# Altium PCB PlacaAmplificador.PcbDoc
Units mm, origin at the board's own origin, x right, y up, seen from the top; angles counter-clockwise.
Board outline 50 x 50 mm, 2 copper layers (Top Layer, Bottom Layer); 17 components, 14 nets, 43 pads, 4 vias.
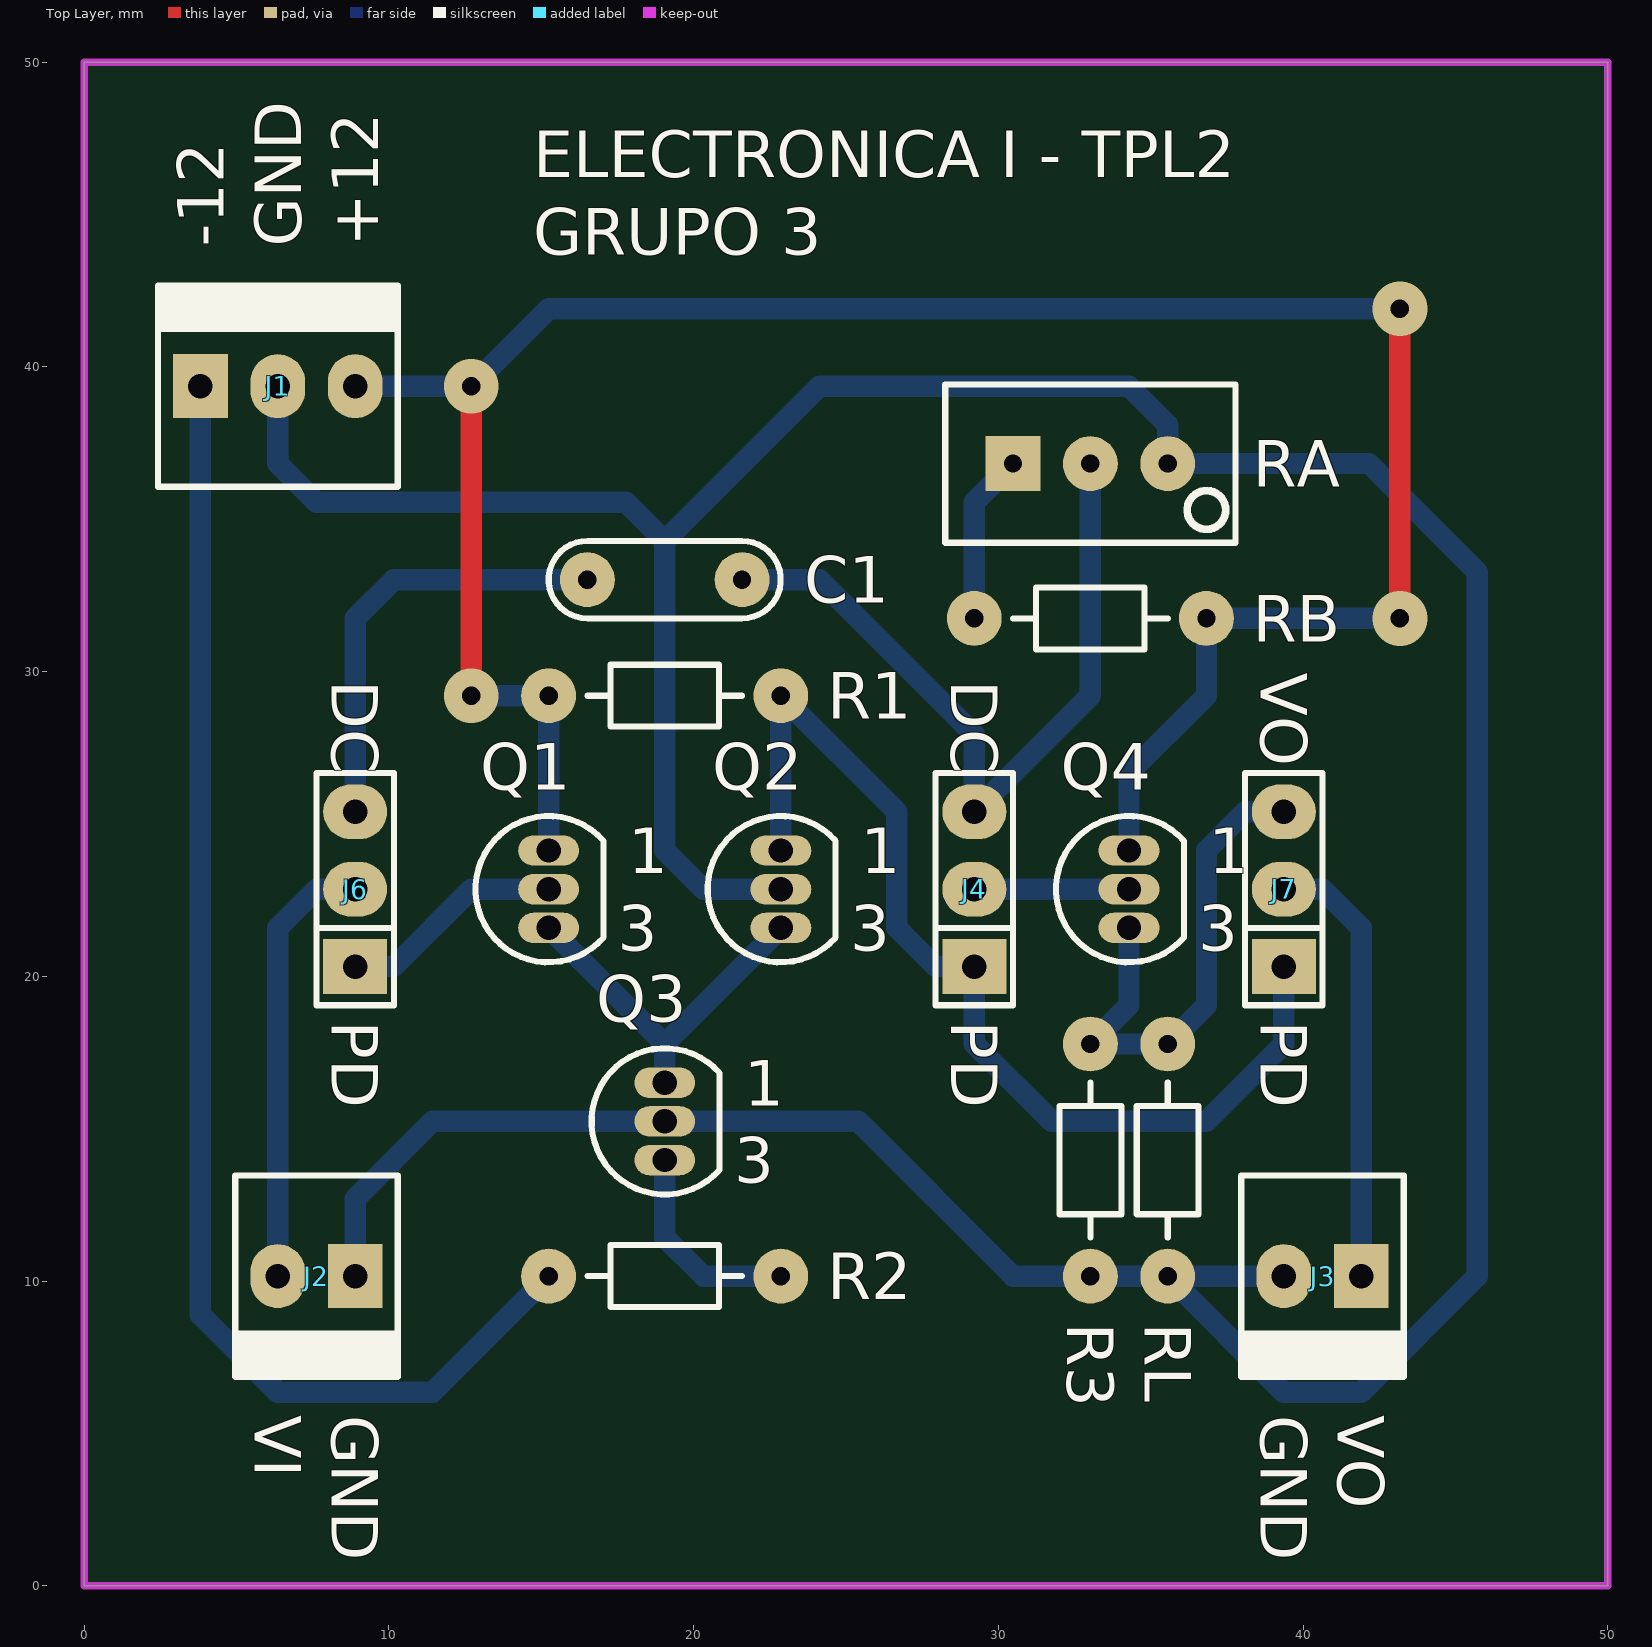
[diagram p0: Top Layer view]
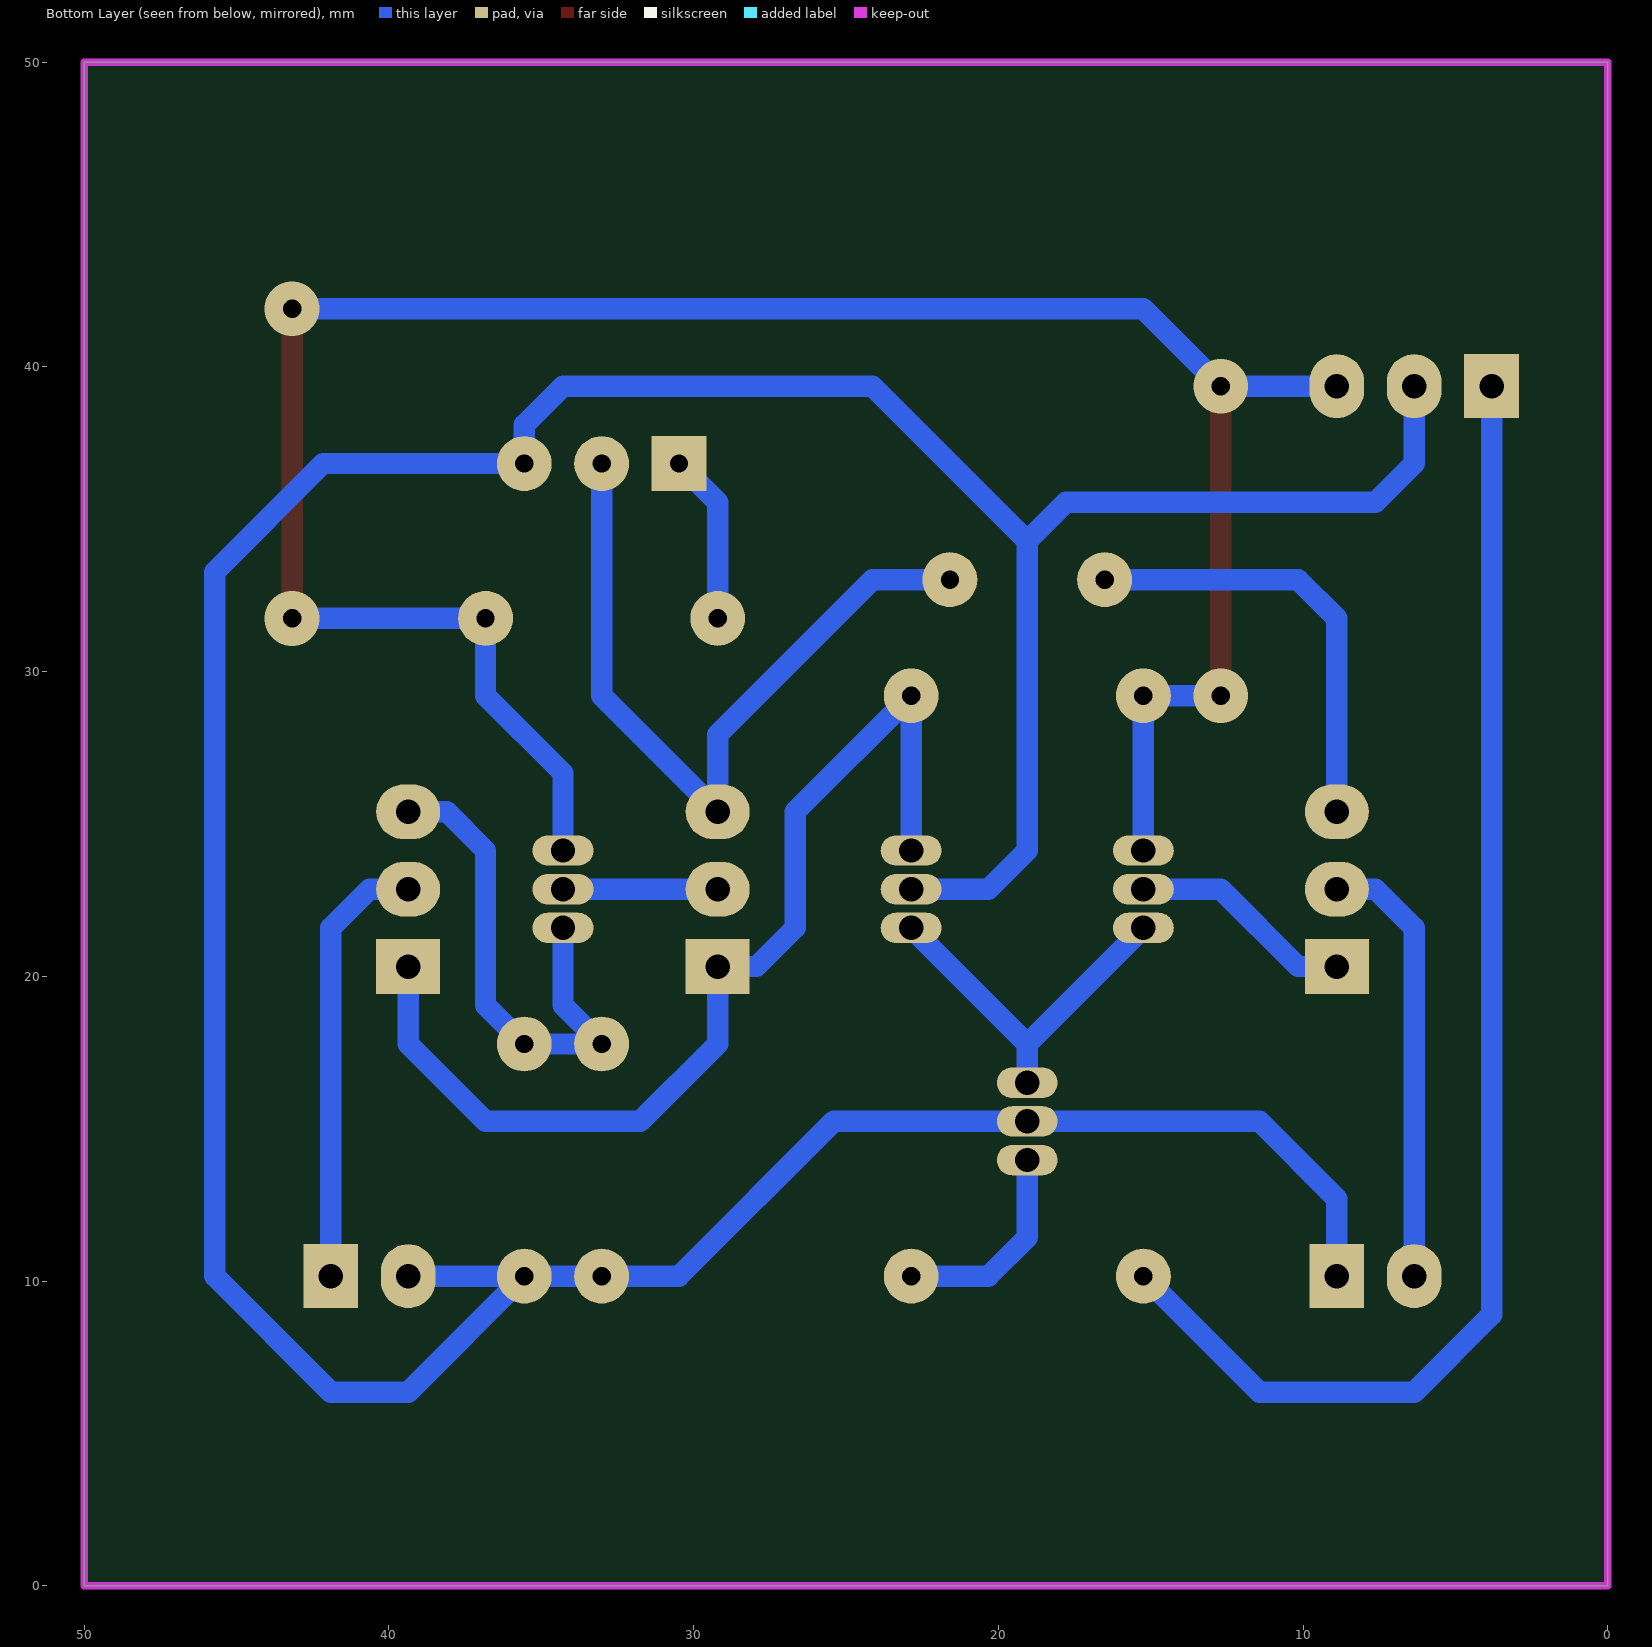
[diagram p1: Bottom Layer view, seen from below]
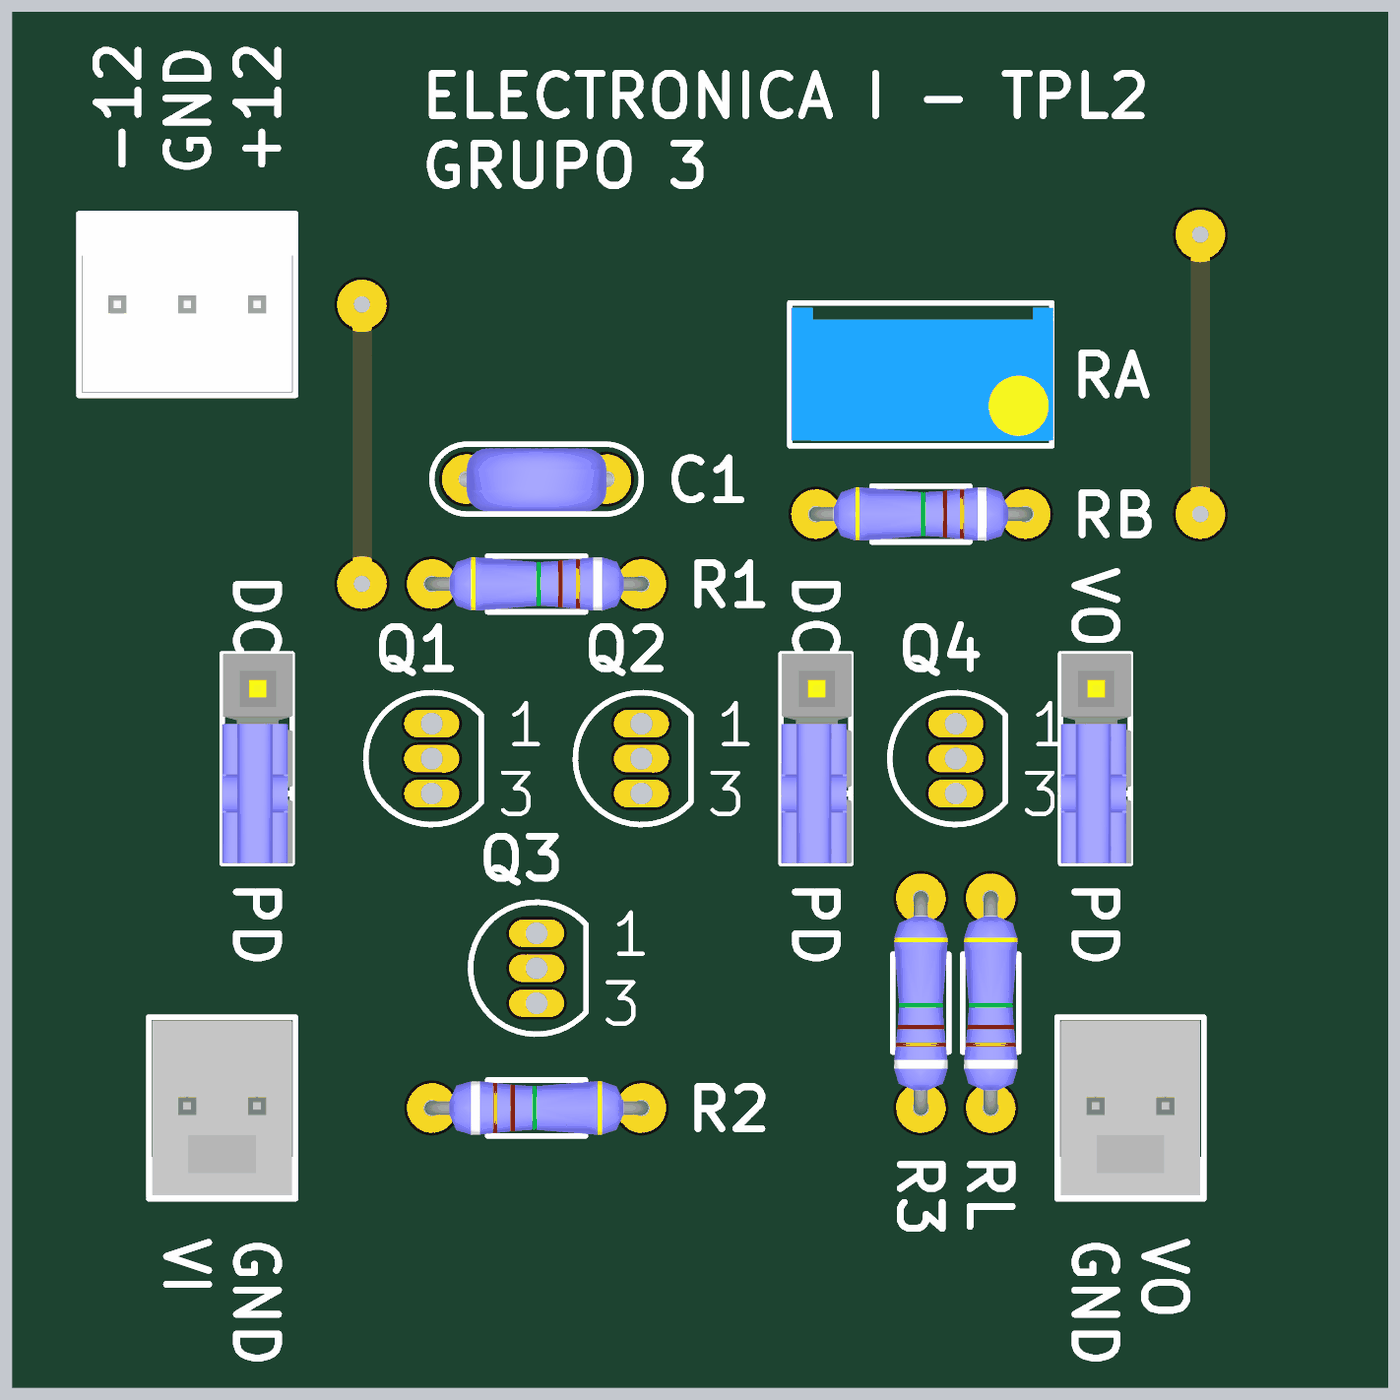
[diagram p2: 3D render of the assembled board from above, using the file's embedded part models]

## Layer stack, top to bottom
Top Solder: solder mask 0.0102, Solder Resist, Dk 3.5
Top Layer: signal copper 0.0356
Dielectric 1: dielectric 0.32, FR-4, Dk 4.8
Bottom Layer: signal copper 0.0356
Bottom Solder: solder mask 0.0102, Solder Resist, Dk 3.5

## Board outline
0,0 0,50 50,50 50,0

## Design rules (kind name [scope] priority, off if disabled: settings)
Clearance [All] p1: gap=0.2
PolygonConnect [All] p1: connectstyle=Relief reliefconductorwidth=0.254 reliefentries=4 polygonreliefangle="90 Angle" airgapwidth=0.254
RoutingVias [All] p1: holewidth=0.6 width=1.8 viastyle="Through Hole" minholewidth=0.6 minwidth=1.8 maxholewidth=0.6 maxwidth=1.8
SolderMaskExpansion [All] p1: expansion=0.102
Width [All] p1: maxlimit=0.7 minlimit=0.7 preferedwidth=0.7
30 further rules are at their usual default settings.

## Components (designator, comment, footprint, x,y, rotation, side; value= is the part's Value field where it differs from the comment)
C1 "1u" CAP200 19.05,33.02 r0 top
J1 "FUENTE" MOLEX3 3.81,39.37 r0 top
J2 "VS" MOLEX2 8.89,10.16 r180 top
J3 "VO" MOLEX2 41.91,10.16 r180 top
J4 "DESACOPLE" JUMPER3 29.21,22.86 r90 top
J6 "SEL_VI" JUMPER3 8.89,22.86 r90 top
J7 "SEL_VO" JUMPER3 39.37,22.86 r90 top
Q1 "2N7000" SOT54 15.24,22.86 r0 top
Q2 "2N7000" SOT54 22.86,22.86 r0 top
Q3 "2N7000" SOT54 19.05,15.24 r0 top
Q4 "2N7000" SOT54 34.29,22.86 r0 top
R1 "6.8K" RES300 22.86,29.21 r180 top
R2 "10K" RES300 15.24,10.16 r0 top
R3 "680K" RES300 33.02,10.16 r90 top
RA "10K" "PRESET V" 33.02,36.83 r0 top
RB "1K" RES300 36.83,31.75 r180 top
RL "2.2K" RES300 35.56,10.16 r90 top

## Footprints (in the part's own frame and the unit in brackets; to place one, negate y for a bottom-side part, rotate by r counter-clockwise, add the part's x,y. Pads: shape width x height; smd on the part's side, far side on the other; paste and mask are expansions set on the pad)
CAP200 [mm]
  round 1.8 hole 0.6: 1(-2.54,0) 2(2.54,0)
  silkscreen extent -3.81,-1.27 3.81,1.27, body extent -2.79,-1.17 2.79,1.12, height 6.24
JUMPER3 [mm]
  rect 1.8x2.1 hole 0.8: 1(-2.54,0)
  oval 1.8x2.1 hole 0.8: 2(0,0) 3(2.54,0)
  silkscreen extent -3.81,-1.27 3.81,1.27, body extent -3.81,-1.3 3.81,1.27, height 16.15
MOLEX2 [mm]
  rect 1.8x2.1 hole 0.8: 1(0,0)
  oval 1.8x2.1 hole 0.8: 2(2.54,0)
  silkscreen extent -1.4,-3.3 3.94,3.3, body extent -1.27,-3.17 3.81,3.18, height 10.74
MOLEX3 [mm]
  rect 1.8x2.1 hole 0.8: 1(0,0)
  oval 1.8x2.1 hole 0.8: 2(2.54,0) 3(5.08,0)
  silkscreen extent -1.4,-3.3 6.48,3.3, body extent -1.27,-3.17 6.35,3.17, height 10.74
"PRESET V" [mm]
  rect 1.8x1.8 hole 0.6: 1(-2.54,0)
  round 1.8 hole 0.6: 2(0,0) 3(2.54,0)
  silkscreen extent -4.76,-2.6 4.76,2.6, body extent -4.7,-2.42 4.83,2.42, height 11.55
RES300 [mm]
  round 1.8 hole 0.6: 1(0,0) 2(7.62,0)
  silkscreen extent 1.27,-1.02 6.35,1.02, body extent -0.25,-0.97 7.87,0.97, height 2.01
SOT54 [mm] "TO, Flat Index; 3 In-Line, Axial Leads; Body Dia. 4.6mm; Leads 0.48 x 0.45 mm (max)"
  oval 2x1 hole 0.8: 1(0,1.27) 2(0,0) 3(0,-1.27)
  silkscreen extent -2.4,-2.4 1.8,2.4

## Part data
C1: library part CAP
J1: library part MOLEX3
J2 J3: library part MOLEX2
J4 J6 J7: library part JUMPER3
Q1 Q2 Q3 Q4: "N-channel Enhancement Mode Field-effect Transistor"
R1 R2 R3 RB RL: library part RES
RA: library part PRESET

## Via types
v1: diameter 1.8, hole 0.6, Top Layer to Bottom Layer, 4 vias

## Nets (pads, with @x,y where several pads share a name; then routed paths per layer and width w, separated by ;. In a path a pad name is that pad's centre, name@x,y a point inside that pad or via, vN(x,y) a via of type N, cw(c..) or ccw(c..) an arc to the next point about the centre after c; other vN are vias at no path point)
+12V: J1.3 Q1.1 Q4.1 R1.2 RB.1 | length 78.3
  Top Layer w0.7: v1(12.7,29.21) v1(12.7,39.37) ; v1(43.18,31.75) v1(43.18,41.91)
  Bottom Layer w0.7: J1.3 v1(12.7,39.37) 15.24,41.91 v1(43.18,41.91) ; v1(12.7,29.21) R1.2 Q1.1 ; Q4.1 34.29,26.67 36.83,29.21 RB.1 v1(43.18,31.75)
-12V: J1.1 R2.1 | length 44.5
  Bottom Layer w0.7: J1.1 3.81,8.89 6.35,6.35 11.43,6.35 R2.1
DRAINCOMUN: C1.1 J6.3 | length 14.5
  Bottom Layer w0.7: J6.3 8.89,31.75 10.16,33.02 C1.1
GND: J1.2 J2.1 J3.2 Q2.2 Q3.2 R3.1 RA.3 RL.1 | length 135.4
  Bottom Layer w0.7: J1.2 6.35,36.83 7.62,35.56 17.78,35.56 19.05,34.29 ; J2.1 8.89,12.7 11.43,15.24 Q3.2 25.4,15.24 30.48,10.16 R3.1 RL.1 ; Q2.2 20.32,22.86 19.05,24.13 19.05,34.29 ; J3.2 RL.1 ; 19.05,34.29 24.13,39.37 34.29,39.37 35.56,38.1 RA.3 42.164,36.83 45.72,33.274 45.72,10.16 41.91,6.35 39.37,6.35 RL.1
NetC1_2: C1.2 J4.3 RA.2 | length 25.3
  Bottom Layer w0.7: C1.2 24.13,33.02 29.21,27.94 J4.3 33.02,29.21 RA.2
NetJ2_2: J2.2 J6.2 | length 14.5
  Bottom Layer w0.7: J2.2 6.35,21.59 7.62,22.86 J6.2
NetJ3_1: J3.1 J7.2 | length 14.5
  Bottom Layer w0.7: J7.2 40.64,22.86 41.91,21.59 J3.1
NetJ4_2: J4.2 Q4.2 | length 5.1
  Bottom Layer w0.7: J4.2 Q4.2
NetJ6_1: J6.1 Q1.2 | length 7.4
  Bottom Layer w0.7: J6.1 10.16,20.32 12.7,22.86 Q1.2
NetJ7_3: J7.3 Q4.3 R3.2 RL.2 | length 16.8
  Bottom Layer w0.7: Q4.3 34.29,19.05 R3.2 RL.2 36.83,19.05 36.83,24.13 38.1,25.4 J7.3
NetQ1_3: Q1.3 Q2.3 Q3.1 | length 11.8
  Bottom Layer w0.7: Q1.3 19.05,17.78 ; Q3.1@19.05,16.79 19.05,17.78 ; Q2.3 19.05,17.78
NetQ3_3: Q3.3 R2.2 | length 6.9
  Bottom Layer w0.7: Q3.3 19.05,11.43 20.32,10.16 R2.2
NetRA_1: RA.1 RB.2 | length 5.6
  Bottom Layer w0.7: RB.2 29.21,35.56 RA.1
PARDIFERENCIAL: J4.1 J7.1 Q2.1 R1.1 | length 34.4
  Bottom Layer w0.7: Q2.1@22.86,24.41 R1.1 26.67,25.4 26.67,21.59 27.94,20.32 J4.1 29.21,17.78 31.75,15.24 36.83,15.24 39.37,17.78 J7.1

## Keep-outs
Keep-Out Layer:
  the board outline again, w0.254

## Silkscreen, mask and mechanical layers (free items; w line width, h text height)
Top Overlay:
  text "ELECTRONICA I - TPL2" at 14.732,46.228 h1.52
  text "-12" at 4.572,43.942 h1.52 r90
  text "GND" at 7.112,43.942 h1.52 r90
  text "+12" at 9.652,43.942 h1.52 r90
  text "GRUPO 3" at 14.732,43.688 h1.52
  text "VO" at 38.608,29.972 h1.52 r270
  text "DC" at 8.128,29.718 h1.52 r270
  text "DC" at 28.448,29.718 h1.52 r270
  text "PD" at 8.128,18.542 h1.52 r270
  text "PD" at 28.448,18.542 h1.52 r270
  text "PD" at 38.608,18.542 h1.52 r270
  text "VI" at 5.588,5.588 h1.52 r270
  text "GND" at 8.128,5.588 h1.52 r270
  text "GND" at 38.608,5.588 h1.52 r270
  text "VO" at 41.148,5.588 h1.52 r270

## Text inside footprints (layer, text, board x,y; h text height)
Q1: Top Overlay "1" at 17.856,23.38 h1.5; Top Overlay "3" at 17.515,20.84 h1.5
Q2: Top Overlay "1" at 25.476,23.38 h1.5; Top Overlay "3" at 25.135,20.84 h1.5
Q3: Top Overlay "1" at 21.666,15.76 h1.5; Top Overlay "3" at 21.325,13.22 h1.5
Q4: Top Overlay "1" at 36.906,23.38 h1.5; Top Overlay "3" at 36.565,20.84 h1.5